# Altium PCB CW.PcbDoc (part 2 of 2)
Units mm, origin at the board's own origin, x right, y up, seen from the top; angles counter-clockwise.
Board outline 140 x 90 mm, 2 copper layers (Top Layer, Bottom Layer), stack 1.671 mm thick; 47 components, 38 nets, 137 pads, 5 vias.
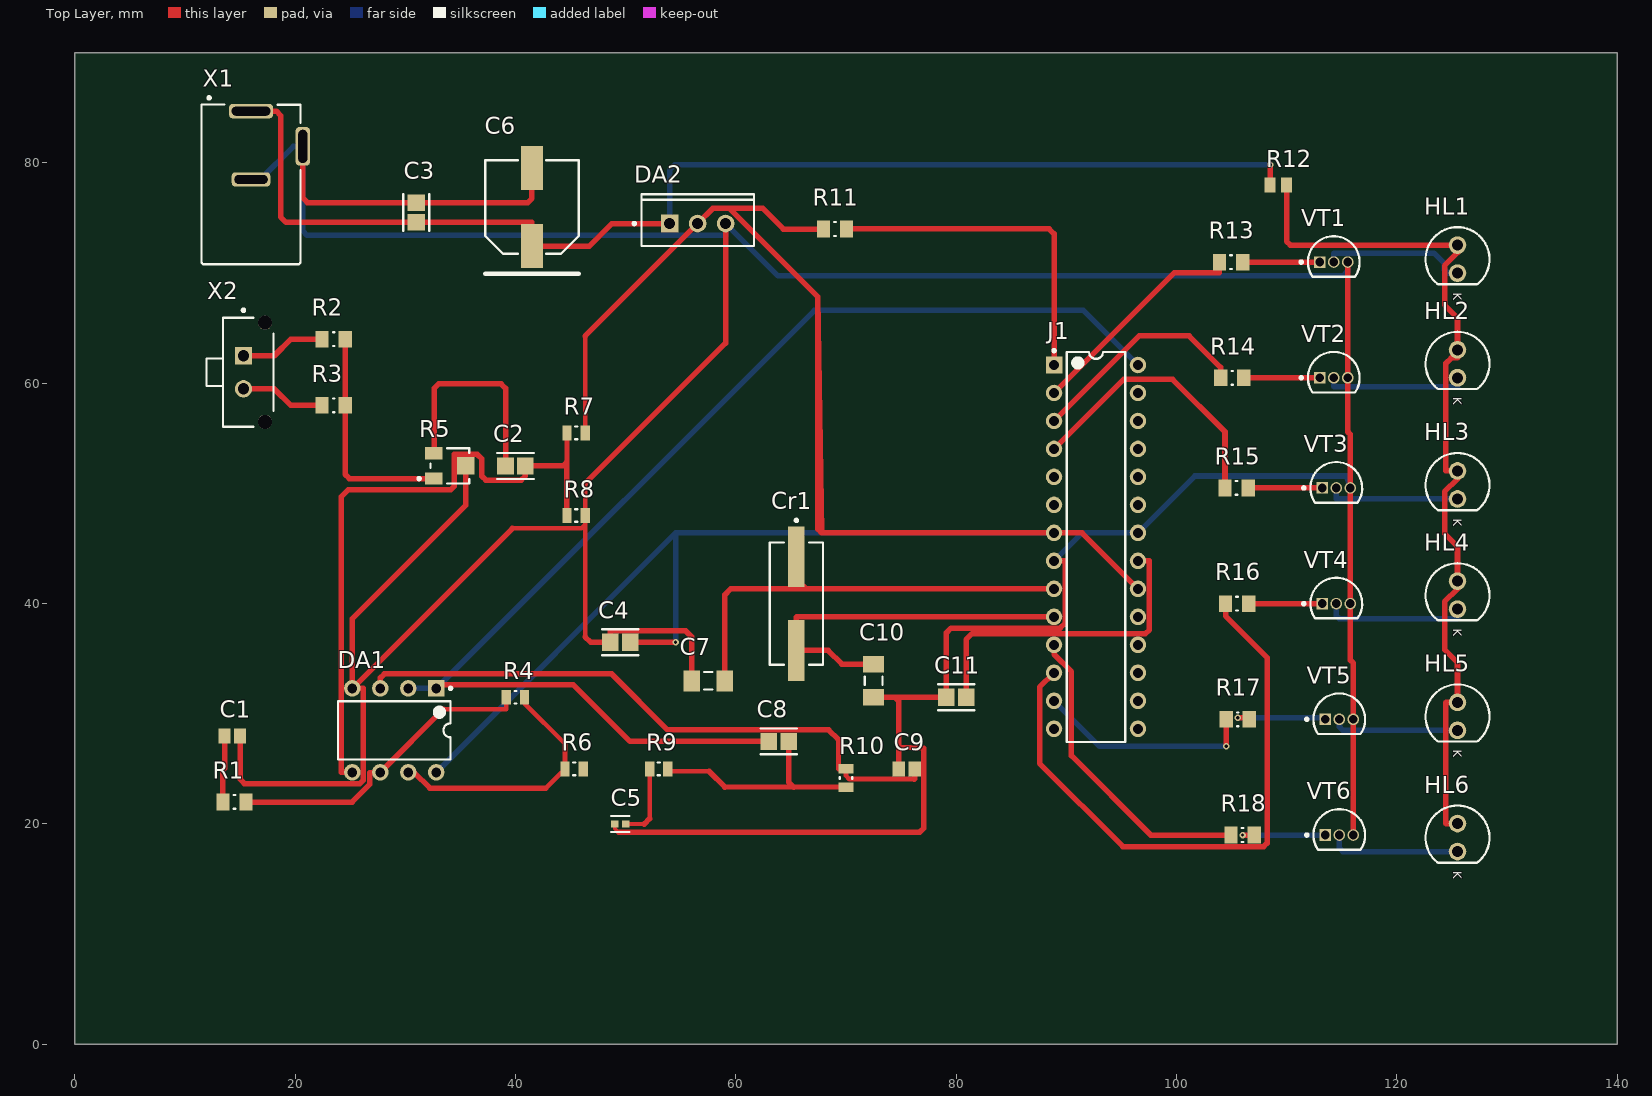
[diagram p0: Top Layer view]

## Part data (continued)
R6 R9 R10: library part CRCW08052K40JNEA, "Resistor,Metal Glaze,2.4KOhms,150WV,5+/-% Tol,-200,200ppm-TC,0805-Case ;RoHS Compliant: Yes", Case Code (Imperial)=0805, Case Code (Metric)=2012, Manufacturer="Vishay Dale", Max Operating Temperature=155°C, Max Power Dissipation=125mW, Min Operating Temperature=-55°C, Package Quantity=1, Resistance Tolerance=5%, Resistor Type="Thick Film", Supplier Part Number 1=541-2.4KACT-ND, Temperature Coefficient=200ppm/°C, Voltage Rating=150V, Case/Package=0805, Category="Chip SMD Resistors", ComponentLink1Description=https://datasheet.ciiva.com/2525/dcrcwe3-2525095.pdf?src-supplier=Digi-Key, ComponentLink1URL=https://datasheet.ciiva.com/2525/dcrcwe3-2525095.pdf?src-supplier=Digi-Key, ComponentLink2Description=https://datasheet.ciiva.com/2525/dcrcwe3-2525096.pdf?src-supplier=Digi-Key, ComponentLink2URL=https://datasheet.ciiva.com/2525/dcrcwe3-2525096.pdf?src-supplier=Digi-Key, ComponentLink3Description=https://datasheet.ciiva.com/2525/dcrcwe3-2525097.pdf?src-supplier=Digi-Key, ComponentLink3URL=https://datasheet.ciiva.com/2525/dcrcwe3-2525097.pdf?src-supplier=Digi-Key, ComponentLink4Description=https://datasheet.ciiva.com/3258/dcrcwe3-3258442.pdf?src-supplier=Avnet, ComponentLink4URL=https://datasheet.ciiva.com/3258/dcrcwe3-3258442.pdf?src-supplier=Avnet, ComponentLink5Description=https://datasheet.ciiva.com/3258/dcrcwe3-3258443.pdf?src-supplier=Avnet, ComponentLink5URL=https://datasheet.ciiva.com/3258/dcrcwe3-3258443.pdf?src-supplier=Avnet, ComponentLink6Description=https://datasheet.ciiva.com/16392/dcrcw-16392315.pdf?src-supplier=Future+Electronics, ComponentLink6URL=https://datasheet.ciiva.com/16392/dcrcw-16392315.pdf?src-supplier=Future+Electronics, Construction=Rectangular, Contact Plating=Tin, Depth=1.25mm, Features="Automotive AEC-Q200", Height=0.02inch, Lead Free="Lead Free", Length=2mm, Manufacturer Part Number=CRCW08052K40JNEA, Military Standard=Not, Number of Pins=2, Number of Terminations=2, Packaging="Tape and Reel", Power Rating=125mW, Pricing 1="1=0,10000, 10=0,04200, 100=0,01700, 1000=0,00762, 2500=0,00661 (USD)", Radiation Hardening=No, REACH SVHC=Unknown, Resistance=2.4kR, RoHS=Yes, RoHS Compliant=Yes, Series=CRCW, Size Code=0805, Stock 1=1280, Supplier 1=Digi-Key, Termination=SMD/SMT, Tolerance=5%, Voltage Rating (DC)=150V, Weight=0.000194oz, Width=1.25mm
R7 R8: library part CRCW0805220KJNEA, "RES SMD 220K OHM 5% 1/8W 0805", Case Code (Imperial)=0805, Case Code (Metric)=2012, Manufacturer="Vishay Dale", Max Operating Temperature=155°C, Max Power Dissipation=125mW, Min Operating Temperature=-55°C, Package Quantity=1, Resistance Tolerance=5%, Resistor Type="Thick Film", Supplier Part Number 1=541-220KACT-ND, Temperature Coefficient=200ppm/°C, Voltage Rating=150V, Case/Package=0805, Category="Chip SMD Resistors", ComponentLink1Description=https://datasheet.ciiva.com/2464/dcrcwe3-2464864.pdf?src-supplier=Digi-Key, ComponentLink1URL=https://datasheet.ciiva.com/2464/dcrcwe3-2464864.pdf?src-supplier=Digi-Key, ComponentLink2Description=https://datasheet.ciiva.com/2464/dcrcwe3-2464865.pdf?src-supplier=Digi-Key, ComponentLink2URL=https://datasheet.ciiva.com/2464/dcrcwe3-2464865.pdf?src-supplier=Digi-Key, ComponentLink3Description=https://datasheet.ciiva.com/2464/dcrcwe3-2464866.pdf?src-supplier=Digi-Key, ComponentLink3URL=https://datasheet.ciiva.com/2464/dcrcwe3-2464866.pdf?src-supplier=Digi-Key, ComponentLink4Description=https://datasheet.ciiva.com/3258/dcrcwe3-3258325.pdf?src-supplier=Avnet, ComponentLink4URL=https://datasheet.ciiva.com/3258/dcrcwe3-3258325.pdf?src-supplier=Avnet, ComponentLink5Description=https://datasheet.ciiva.com/17166/dcrcwe3-17166711.pdf?src-supplier=Avnet+Europe, ComponentLink5URL=https://datasheet.ciiva.com/17166/dcrcwe3-17166711.pdf?src-supplier=Avnet+Europe, ComponentLink6Description=https://datasheet.ciiva.com/28606/1747939-28606759.pdf?src-supplier=Element14, ComponentLink6URL=https://datasheet.ciiva.com/28606/1747939-28606759.pdf?src-supplier=Element14, ComponentLink7Description=https://datasheet.ciiva.com/16498/dcrcw-16498286.pdf?src-supplier=Future+Electronics, ComponentLink7URL=https://datasheet.ciiva.com/16498/dcrcw-16498286.pdf?src-supplier=Future+Electronics, Construction=Rectangular, Contact Plating=Tin, Depth=1.25mm, Features="Automotive AEC-Q200", Height=0.02inch, Lead Free="Lead Free", Length=2mm, Manufacturer Part Number=CRCW0805220KJNEA, Military Standard=Not, Mount="Surface Mount", Number of Terminations=2, Packaging="Tape and Reel", Power Rating=125mW, Pricing 1="1=0,10000, 10=0,04200, 100=0,01700, 1000=0,00762, 2500=0,00661 (USD)", Radiation Hardening=No, REACH SVHC=Unknown, Resistance=220kR, RoHS=Yes, RoHS Compliant=Yes, Series=CRCW, Size Code=0805, Stock 1=1120, Supplier 1=Digi-Key, Termination=SMD/SMT, Tolerance=5%, Voltage Rating (DC)=150V, Weight=0.000194oz, Width=0.049inch
R12: library part ERA-6AEB101V, "SISTOR, METAL FILM, 100 OHM, 125mW, 0.1%; Product Range:PANASONIC - ERA Series; Resistance:100ohm; Power Rating:125mW; Resistance Tolerance:± 0.1%; Resistor Case Style:0805 ^2012 Metric]; Resistor Element Type:Thin Film; MSL:-", Case Code (Imperial)=0805, Case Code (Metric)=2012, Manufacturer=Panasonic, Max Operating Temperature=155°C, Max Power Dissipation=125mW, Min Operating Temperature=-55°C, Package Quantity=1, Resistance Tolerance=0.1%, Resistor Type="Thin Film", Supplier Part Number 1=P100DACT-ND, Temperature Coefficient=25ppm/°C, Voltage Rating=100V, Case/Package=0805, Category="Chip SMD Resistors", ComponentLink1Description=https://datasheet.ciiva.com/11810/0900766b80beefcc-11810733.pdf?src-supplier=RSComponents, ComponentLink1URL=https://datasheet.ciiva.com/11810/0900766b80beefcc-11810733.pdf?src-supplier=RSComponents, ComponentLink2Description=https://datasheet.ciiva.com/29184/452698-da-01-en-widerstand-0805-era-29184051.pdf?src-supplier=Conrad, ComponentLink2URL=https://datasheet.ciiva.com/29184/452698-da-01-en-widerstand-0805-era-29184051.pdf?src-supplier=Conrad, ComponentLink3Description=https://datasheet.ciiva.com/16774/70068849-16774677.pdf?src-supplier=Allied+Electronics, ComponentLink3URL=https://datasheet.ciiva.com/16774/70068849-16774677.pdf?src-supplier=Allied+Electronics, ComponentLink4Description=https://datasheet.ciiva.com/22758/485442-22758149.pdf?src-supplier=Farnell, ComponentLink4URL=https://datasheet.ciiva.com/22758/485442-22758149.pdf?src-supplier=Farnell, ComponentLink5Description=https://datasheet.ciiva.com/46438/485442-46438213.pdf?src-supplier=Element14, ComponentLink5URL=https://datasheet.ciiva.com/46438/485442-46438213.pdf?src-supplier=Element14, ComponentLink6Description=https://datasheet.ciiva.com/46438/485442-46438214.pdf?src-supplier=Element14, ComponentLink6URL=https://datasheet.ciiva.com/46438/485442-46438214.pdf?src-supplier=Element14, ComponentLink7Description=https://datasheet.ciiva.com/16770/70068849-16770007.pdf?src-supplier=Allied+Electronics, ComponentLink7URL=https://datasheet.ciiva.com/16770/70068849-16770007.pdf?src-supplier=Allied+Electronics, ComponentLink8Description=https://datasheet.ciiva.com/30140/54aoa0000ce26-30140696.pdf?src-supplier=Onlinecomponents.com, ComponentLink8URL=https://datasheet.ciiva.com/30140/54aoa0000ce26-30140696.pdf?src-supplier=Onlinecomponents.com, ComponentLink9Description=https://datasheet.ciiva.com/17207/aoa0000ce26-17207961.pdf?src-supplier=Avnet+Europe, ComponentLink9URL=https://datasheet.ciiva.com/17207/aoa0000ce26-17207961.pdf?src-supplier=Avnet+Europe, ComponentLink10Description=https://datasheet.ciiva.com/24072/aoa0000ce26-32660-24072217.pdf?src-supplier=Mouser, ComponentLink10URL=https://datasheet.ciiva.com/24072/aoa0000ce26-32660-24072217.pdf?src-supplier=Mouser, ComponentLink11Description=https://datasheet.ciiva.com/28513/485442-28513850.pdf?src-supplier=Element14, ComponentLink11URL=https://datasheet.ciiva.com/28513/485442-28513850.pdf?src-supplier=Element14, ComponentLink12Description=https://datasheet.ciiva.com/48536/era-eng-tds-48536747.pdf?src-supplier=Distrelec, ComponentLink12URL=https://datasheet.ciiva.com/48536/era-eng-tds-48536747.pdf?src-supplier=Distrelec, ComponentLink13Description=https://datasheet.ciiva.com/16396/aoa0000ce26-16396828.pdf?src-supplier=Future+Electronics, ComponentLink13URL=https://datasheet.ciiva.com/16396/aoa0000ce26-16396828.pdf?src-supplier=Future+Electronics, ComponentLink14Description=https://datasheet.ciiva.com/9186/aoa0000ce26-9186749.pdf?src-supplier=Avnet, ComponentLink14URL=https://datasheet.ciiva.com/9186/aoa0000ce26-9186749.pdf?src-supplier=Avnet, Construction=Rectangular, Contact Plating=Tin, Depth=1.25mm, Features="Automotive AEC-Q200", Height=0.5mm, Lead Free="Lead Free", Length=2mm, Manufacturer Part Number=ERA-6AEB101V, Military Standard=Not, Mount="Surface Mount", Number of Pins=2, Number of Terminations=2, Packaging="Tape and Reel", Power Rating=125mW, Pricing 1="1=0,31000, 10=0,26200, 100=0,10230, 1000=0,04284, 2500=0,03927 (USD)", Radiation Hardening=No, REACH SVHC="No SVHC", Resistance=100R, RoHS=Yes, RoHS Compliant=Yes, Series=ERA-6A, Size Code=0805, Stock 1=69, Supplier 1=Digi-Key, Technology="THIN FILM", Termination=SMD/SMT, Tolerance=0.1%, Voltage Rating (DC)=100V, Width=1.25mm
VT1 VT2 VT3 VT4 VT5 VT6: "TRANS NPN 80V 1A TO-92", Case/Package=TO-92, Collector Base Voltage (VCBO)=80V, Collector Emitter Saturation Voltage=500mV, Current Rating=1A, Emitter Base Voltage (VEBO)=5V, Frequency=100MHz, Manufacturer="ON Semiconductor / Fairchild", Max Operating Temperature=150°C, Max Power Dissipation=625mW, Min Operating Temperature=-55°C, Package Quantity=5000, Power Dissipation=1W, Transition Frequency=200MHz, Category=BJTs, Collector Emitter Breakdown Voltage=80V, Collector Emitter Voltage (VCEO)=80V, Collector-emitter Voltage-Max=500mV, ComponentLink1Description=https://datasheet.ciiva.com/982/bc639-982480.pdf?src-supplier=Digi-Key, ComponentLink1URL=https://datasheet.ciiva.com/982/bc639-982480.pdf?src-supplier=Digi-Key, ComponentLink2Description=https://datasheet.ciiva.com/986/bc635-637-639rev5-986450.pdf?src-supplier=Digi-Key, ComponentLink2URL=https://datasheet.ciiva.com/986/bc635-637-639rev5-986450.pdf?src-supplier=Digi-Key, ComponentLink3Description=https://datasheet.ciiva.com/17179/bc63916-17179413.pdf?src-supplier=Future+Electronics, ComponentLink3URL=https://datasheet.ciiva.com/17179/bc63916-17179413.pdf?src-supplier=Future+Electronics, ComponentLink4Description=https://datasheet.ciiva.com/1195/5224-1195640.pdf?src-supplier=Element14, ComponentLink4URL=https://datasheet.ciiva.com/1195/5224-1195640.pdf?src-supplier=Element14, ComponentLink5Description=https://datasheet.ciiva.com/1195/5224-1195641.pdf?src-supplier=Element14, ComponentLink5URL=https://datasheet.ciiva.com/1195/5224-1195641.pdf?src-supplier=Element14, ComponentLink6Description=https://datasheet.ciiva.com/1217/5224-1217209.pdf?src-supplier=Farnell, ComponentLink6URL=https://datasheet.ciiva.com/1217/5224-1217209.pdf?src-supplier=Farnell, Contact Plating=Copper,Tin,Silver, Element Configuration=Single, Gain Bandwidth Product=200MHz, hFE Min=40, Lead Free="Lead Free", Manufacturer Part Number=BC639, Max Breakdown Voltage=80V, Max Collector Current=1A, Mount="Through Hole", Number of Elements=1, Number of Pins=3, Packaging=Bulk, Polarity=NPN, Pricing 1="5342=0,06646, 5400=0,06552, 11000=0,06365, 27000=0,06224, 54000=0,05990, 270000=0,05850, 540000=0,05710 (USD)", REACH SVHC="No SVHC", RoHS=No, RoHS Compliant=No, Series=-, Stock 1=10708, Supplier 1=Avnet, Supplier Part Number 1=BC639, Termination="Through Hole", Voltage Rating (DC)=80V, Weight=0.201g
X1: library part KLDX-0202-A, "KYCON - KLDX-0202-A - DC Power Connector, Jack, 3.5 A, 2 mm, PCB Mount, Through Hole", Color=Black, Current Rating=3.5A, Flammability Rating="UL94 V-0", Insulation Resistance=100MR, Manufacturer=Kycon, Max Operating Temperature=85°C, Min Operating Temperature=-25°C, Package Quantity=500, Supplier Part Number 1=2092-KLDX-0202-A-ND, Voltage Rating=24V, Category=Connectors, ComponentLink1Description=http://www.mouser.com/ds/2/222/KLDX_0202_LT-334784.pdf?src-supplier=Mouser, ComponentLink1URL=http://www.mouser.com/ds/2/222/KLDX_0202_LT-334784.pdf?src-supplier=Mouser, ComponentLink2Description=http://domino2.kycon.com/catalog_PDF/KLDX_0202.pdf?src-supplier=Avnet, ComponentLink2URL=http://domino2.kycon.com/catalog_PDF/KLDX_0202.pdf?src-supplier=Avnet, ComponentLink3Description=http://domino2.kycon.com/catalog_PDF/KLDX_0202.pdf?src-supplier=Avnet+Europe, ComponentLink3URL=http://domino2.kycon.com/catalog_PDF/KLDX_0202.pdf?src-supplier=Avnet+Europe, Connector Type=Power, Contact Gender=Female, Contact Material=Brass, Contact Plating=Tin, Gender=Female, Housing Material=PBT, Manufacturer Part Number=KLDX-0202-A, Mount="Through Hole", Number of Contacts=2, Orientation="Right Angle", Packaging=Bag, Pricing 1="1=0,54000, 10=0,50600, 25=0,45560, 50=0,40480, 100=0,38790, 250=0,35420, 500=0,33734, 1000=0,27831, 2500=0,25300 (USD)", Radiation Hardening=No, RoHS=Yes, RoHS Compliant=Yes, Series=KLDX, Stock 1=10383, Supplier 1=Digi-Key, Termination=Solder, Voltage Rating (DC)=24V
X2: library part 43650-0229, "MOLEX - 43650-0229 - Wire-To-Board Connector, 3 mm, 2 Contacts, Header, Micro-Fit 3.0 43650 Series, Through Hole, 1 Rows", Current Rating=5A, Manufacturer=Molex, Package Quantity=3264, Supplier Part Number 1=WM10662-ND, Voltage Rating=600V, Category="Headers and Wire Housings", ComponentLink1Description=https://datasheet.ciiva.com/13564/0436500229-pcb-headers-148697-13564517.pdf?src-supplier=Mouser, ComponentLink1URL=https://datasheet.ciiva.com/13564/0436500229-pcb-headers-148697-13564517.pdf?src-supplier=Mouser, ComponentLink2Description=https://datasheet.ciiva.com/16654/0436500229-pcb-headers-16654485.pdf?src-supplier=Avnet+Europe, ComponentLink2URL=https://datasheet.ciiva.com/16654/0436500229-pcb-headers-16654485.pdf?src-supplier=Avnet+Europe, Contact Material=Brass, Contact Plating=Gold, Gender=Male, Glow Wire Compliant=Compliant, Halogen Free="Low Halogen", Housing Material=Thermoplastic, Manufacturer Part Number=43650-0229, Mount="Through Hole", Number of Circuits=2, Number of Contacts=2, Number of Positions=2, Number of Rows=1, Orientation=Vertical, Packaging=Tray, Pitch=3mm, Pricing 1="1=1,21000, 10=1,00100, 440=0,83407, 3264=0,60469, 6528=0,58384, 13056=0,54214 (USD)", Radiation Hardening=No, RoHS=Yes, RoHS Compliant=Yes, Series=43650, Stock 1=5963, Supplier 1=Digi-Key, Termination="Through Hole"

## Via types
v1: diameter 0.6, hole 0.3, Top Layer to Bottom Layer, 5 vias

## Nets (pads, with @x,y where several pads share a name; then routed paths per layer and width w, separated by ;. In a path a pad name is that pad's centre, name@x,y a point inside that pad or via, vN(x,y) a via of type N, cw(c..) or ccw(c..) an arc to the next point about the centre after c; other vN are vias at no path point)
GND: C1.1 C3.1 C4.1 C5.1 C6.- C7.1 C9.1 C10.1 C11.1 DA1.4 DA2.3 J1.8 J1.22 R5.2 R8.1 VT1.3 VT2.3 VT3.3 VT4.3 VT5.3 VT6.3 X1.2 X1.3 | length 433.9
  Top Layer w0.334: C5.1 49,19.626 49.375,19.251
  Top Layer w0.425: 39.715,46.835 46.008,46.835 46.325,47.152 ; 46.325,36.992 46.325,47.152 ; 46.325,50.897 R8.1 46.325,47.152
  Top Layer w0.5: C1.1 15,24.073 15.402,23.67 25.88,23.67 26.2,23.99 26.2,32.281 26.171,32.31 DA1.4 ; X1.3 20.7,76.818 21.117,76.401 C3.1 41.12,76.401 41.5,76.781 C6.- ; R5.2 35.5,48.949 25.19,38.639 DA1.4 ; 39.715,46.835 DA1.4 ; 46.325,36.992 46.817,36.5 C4.1 48.599,37.513 48.625,37.539 55.453,37.539 55.999,36.992 C7.1 ; 46.325,50.897 59.08,63.652 DA2.3 ; 49.375,19.251 76.68,19.251 77.061,19.632 77.061,26.896 74.775,26.959 ; C10.1 74.457,31.5 ; C9.1 74.775,26.959 ; J1.8 89.888,43.88 89.913,43.855 89.913,38.262 89.431,37.78 79.537,37.78 79.099,37.342 C11.1 74.457,31.5 ; VT1.3 VT2.3 115.54,55.599 115.77,55.369 VT3.3 VT4.3 115.77,34.862 116.04,34.592 VT5.3 VT6.3 ; 74.457,31.5 74.775,31.183 74.775,26.959
  Bottom Layer w0.5: X1.2 16.838,78.5 19.838,81.5 X1.3 20.7,73.822 21.094,73.429 59.055,73.429 59.08,73.454 DA2.3 63.834,69.746 115.097,69.746 115.54,70.188 VT1.3 ; J1.8 91.42,46.42 J1.22 101.665,51.585 115.415,51.585 VT3.3
NetC1_2: C1.2 R1.1 | length 6.1
  Top Layer w0.5: R1.1 13.449,24.915 13.6,25.066 C1.2
NetC2_1: C2.1 R5.3 | length 19.8
  Top Layer w0.5: R5.3 32.611,53.65 32.611,59.535 33.017,59.941 38.693,59.941 39.099,59.535 C2.1
NetC2_2: C2.2 DA1.5 R7.1 R8.2 | length 60.4
  Top Layer w0.425: 44.675,52.867 R7.1
  Top Layer w0.5: DA1.5 24.204,24.69 24.178,24.715 24.178,49.692 24.813,50.327 34.122,50.327 34.44,50.645 34.44,53.535 34.465,53.56 36.523,53.56 36.954,53.129 36.954,51.56 37.31,51.204 40.507,51.204 40.901,51.597 C2.2 44.307,52.5 44.675,52.867 R8.2
NetC3_2: C3.2 C6.+ DA2.1 R12.1 X1.1 | length 112
  Top Layer w0.5: X1.1 18.292,84.7 18.692,84.3 18.692,75.092 19.185,74.599 C3.2 41.473,74.599 41.5,74.572 C6.+ 46.708,72.45 48.758,74.5 DA2.1 ; R12.1 v1(108.5,79.83)
  Bottom Layer w0.5: DA2.1 54,79.375 54.455,79.83 v1(108.5,79.83)
NetC4_2: C4.2 DA1.8 DA2.2 J1.7 J1.20 R7.2 R11.2 | length 200.3
  Top Layer w0.425: R7.2 46.325,64.285
  Top Layer w0.5: 46.325,64.285 DA2.2 57.907,75.867 59.433,75.867 ; C4.2 v1(54.531,36.5) ; R11.2 64.323,74 62.456,75.867 59.433,75.867 ; J1.20 91.42,46.42 J1.7 67.79,46.42 ; 59.433,75.867 67.449,67.851 ; 67.449,67.851 67.449,46.761 67.79,46.42 ; 67.449,67.851 67.79,46.42
  Bottom Layer w0.5: DA1.8 54.54,46.42 ; v1(54.531,36.5) 54.54,46.42 ; J1.7 54.54,46.42
NetC5_2: C5.2 R9.1 | length 6.9
  Top Layer w0.334: C5.2 51.692,20
  Top Layer w0.425: 52.175,20.482 R9.1
  Top Layer w0.5: 51.692,20 52.175,20.482
NetC7_2: C7.2 Cr1.1 J1.9 | length 41.2
  Top Layer w0.5: C7.2 59.001,40.806 59.535,41.34 66.423,41.34 ; Cr1.1 65.5,42.263 66.423,41.34 ; J1.9 66.423,41.34
NetC8_1: C8.1 R9.2 R10.1 | length 21.3
  Top Layer w0.425: R9.2 53.825,24.788 57.579,24.788 ; 59.017,23.35 65.25,23.35 R10.1
  Top Layer w0.5: 57.579,24.788 59.017,23.35 ; C8.1 64.802,23.798 65.25,23.35
NetC8_2: C8.2 DA1.1 DA1.2 J1.28 | length 115.1
  Top Layer w0.5: DA1.1 32.81,32.636 45.26,32.636 50.397,27.5 C8.2
  Bottom Layer w0.5: DA1.2 DA1.1 67.122,66.622 91.538,66.622 J1.28
NetC9_2: C9.2 DA1.3 R10.2 | length 56.4
  Top Layer w0.425: 69.318,27.654 69.318,25 R10.2 70,24.381 70.305,24.077 76.2,24.077
  Top Layer w0.5: DA1.3 27.73,33.254 28.102,33.627 48.74,33.627 53.82,28.547 68.425,28.547 69.318,27.654 ; 76.2,24.077 76.225,24.102 C9.2
NetC10_2: C10.2 Cr1.2 J1.10 | length 33.9
  Top Layer w0.5: C10.2 69.623,34.502 68.374,35.75 Cr1.2 65.5,38.771 65.529,38.8 J1.10
NetC11_2: C11.2 J1.21 | length 29.5
  Top Layer w0.5: C11.2 80.901,36.728 81.442,37.27 97.176,37.27 97.533,37.627 97.533,43.855 97.508,43.88 J1.21
NetDA1_6: DA1.6 R1.2 R4.1 | length 28.8
  Top Layer w0.425: 33.467,30.427 39.15,30.427 39.175,30.452 R4.1
  Top Layer w0.5: R1.2 15.551,21.994 25.169,21.994 26.786,23.611 26.786,24.644 DA1.6 33.467,30.427
NetDA1_7: DA1.7 R4.2 R6.1 | length 23.6
  Top Layer w0.425: R4.2 40.825,30.935 44.5,27.26 R6.1 42.764,23.264
  Top Layer w0.5: DA1.7 30.804,24.69 32.23,23.264 42.764,23.264
NetHL1_1: HL1.1 VT1.2 | length 13.1
  Bottom Layer w0.5: VT1.2 114.27,71.778 114.295,71.803 123.352,71.803 124.305,70.851 124.305,70.318 124.622,70 HL1.1
NetHL1_2: HL1.2 HL2.2 HL3.2 HL4.2 HL5.2 HL6.2 R12.2 | length 80.1
  Top Layer w0.5: R12.2 110,72.87 110.33,72.54 HL1.2 125.5,71.854 124.33,70.684 124.33,67.104 125.5,65.935 HL2.2 125.5,62.304 124.94,62.304 124.432,61.796 124.432,52.065 124.457,52.04 HL3.2 125.5,51.332 124.33,50.162 124.33,46.354 125.5,45.184 HL4.2 125.5,41.349 124.33,40.179 124.33,35.837 125.5,34.667 HL5.2 124.457,31.04 124.432,31.015 124.432,20.065 124.457,20.04 HL6.2
NetHL2_1: HL2.1 VT2.2 | length 12.8
  Bottom Layer w0.5: VT2.2 114.27,59.713 114.295,59.687 125.5,59.687 HL2.1
NetHL3_1: HL3.1 VT3.2 | length 12
  Bottom Layer w0.5: VT3.2 114.5,49.526 114.526,49.5 HL3.1
NetHL4_1: HL4.1 VT4.2 | length 13.1
  Bottom Layer w0.5: VT4.2 114.5,38.897 114.767,38.631 125.475,38.631 125.5,38.656 HL4.1
NetHL5_1: HL5.1 VT5.2 | length 11.5
  Bottom Layer w0.5: VT5.2 114.77,28.828 115.097,28.5 HL5.1
NetHL6_1: HL6.1 VT6.2 | length 12
  Bottom Layer w0.5: VT6.2 114.77,17.827 115.097,17.5 HL6.1
NetJ1_1: J1.1 R11.1 | length 30.9
  Top Layer w0.5: R11.1 70.051,74.013 88.427,74.013 88.88,73.56 J1.1
NetJ1_2: J1.2 R13.1 | length 20.5
  Top Layer w0.5: J1.2 99.785,70.025 103.873,70.025 103.898,70.051 R13.1
NetJ1_3: J1.3 R14.1 | length 20.4
  Top Layer w0.5: J1.3 96.605,64.305 101.135,64.305 104,61.44 R14.1
NetJ1_4: J1.4 R15.1 | length 25.2
  Top Layer w0.5: J1.4 95.2,60.36 99.639,60.36 104.398,55.6 R15.1
NetJ1_11: J1.11 R18.1 | length 28.2
  Top Layer w0.5: J1.11 88.88,35.405 90.447,33.838 90.447,26.21 97.66,18.997 104.949,18.997 R18.1
NetJ1_12: J1.12 R16.1 | length 56
  Top Layer w0.5: J1.12 87.577,32.417 87.577,25.499 95.133,17.942 107.909,17.942 108.227,18.26 108.227,35.107 104.449,38.885 R16.1
NetJ1_13: J1.13 R17.1 | length 19.8
  Top Layer w0.5: v1(104.5,27.048) R17.1
  Bottom Layer w0.5: J1.13 93.012,27.048 v1(104.5,27.048)
NetR2_1: R2.1 X2.1 | length 7.8
  Top Layer w0.5: X2.1 18.108,62.5 19.608,64 R2.1
NetR2_2: R2.2 R3.2 R5.1 | length 20.5
  Top Layer w0.5: R2.2 R3.2 24.551,51.727 24.927,51.35 R5.1
NetR3_1: R3.1 X2.2 | length 7.8
  Top Layer w0.5: X2.2 18.108,59.5 19.608,58 R3.1
NetR13_2: R13.2 VT1.1 | length 7
  Top Layer w0.5: R13.2 VT1.1
NetR14_2: R14.2 VT2.1 | length 6.9
  Top Layer w0.5: R14.2 VT2.1
NetR15_2: R15.2 VT3.1 | length 6.7
  Top Layer w0.5: R15.2 VT3.1
NetR16_2: R16.2 VT4.1 | length 6.7
  Top Layer w0.5: R16.2 VT4.1
NetR17_2: R17.2 VT5.1 | length 9.3
  Top Layer w0.5: v1(105.56,29.639) 106.602,29.639 R17.2
  Bottom Layer w0.5: v1(105.56,29.639) 113.5,29.639 VT5.1
NetR18_2: R18.2 VT6.1 | length 8.6
  Top Layer w0.5: v1(105.992,18.997) 107.051,18.997 R18.2
  Bottom Layer w0.5: v1(105.992,18.997) 105.995,19 VT6.1
pads on no net: J1.5 J1.6 J1.14 J1.15 J1.16 J1.17 J1.18 J1.19 J1.23 J1.24 J1.25 J1.26 J1.27 R6.2 X2.

## Text inside footprints (layer, text, board x,y; h text height)
HL1: Top Overlay "K" at 125.119,68.222 h0.76 r270; Mechanical 15 "K" at 125.119,68.222 h0.76 r270
HL2: Top Overlay "K" at 125.119,58.722 h0.76 r270; Mechanical 15 "K" at 125.119,58.722 h0.76 r270
HL3: Top Overlay "K" at 125.119,47.722 h0.76 r270; Mechanical 15 "K" at 125.119,47.722 h0.76 r270
HL4: Top Overlay "K" at 125.119,37.722 h0.76 r270; Mechanical 15 "K" at 125.119,37.722 h0.76 r270
HL5: Top Overlay "K" at 125.119,26.722 h0.76 r270; Mechanical 15 "K" at 125.119,26.722 h0.76 r270
HL6: Top Overlay "K" at 125.119,15.722 h0.76 r270; Mechanical 15 "K" at 125.119,15.722 h0.76 r270